# Altium PCB PCB.PcbDoc
Units mm, origin at the board's own origin, x right, y up, seen from the top; angles counter-clockwise.
Board outline 25.4 x 22.86 mm, 2 copper layers (Top Layer, Bottom Layer), stack 0.971 mm thick; 35 components, 50 nets, 185 pads, 31 vias.
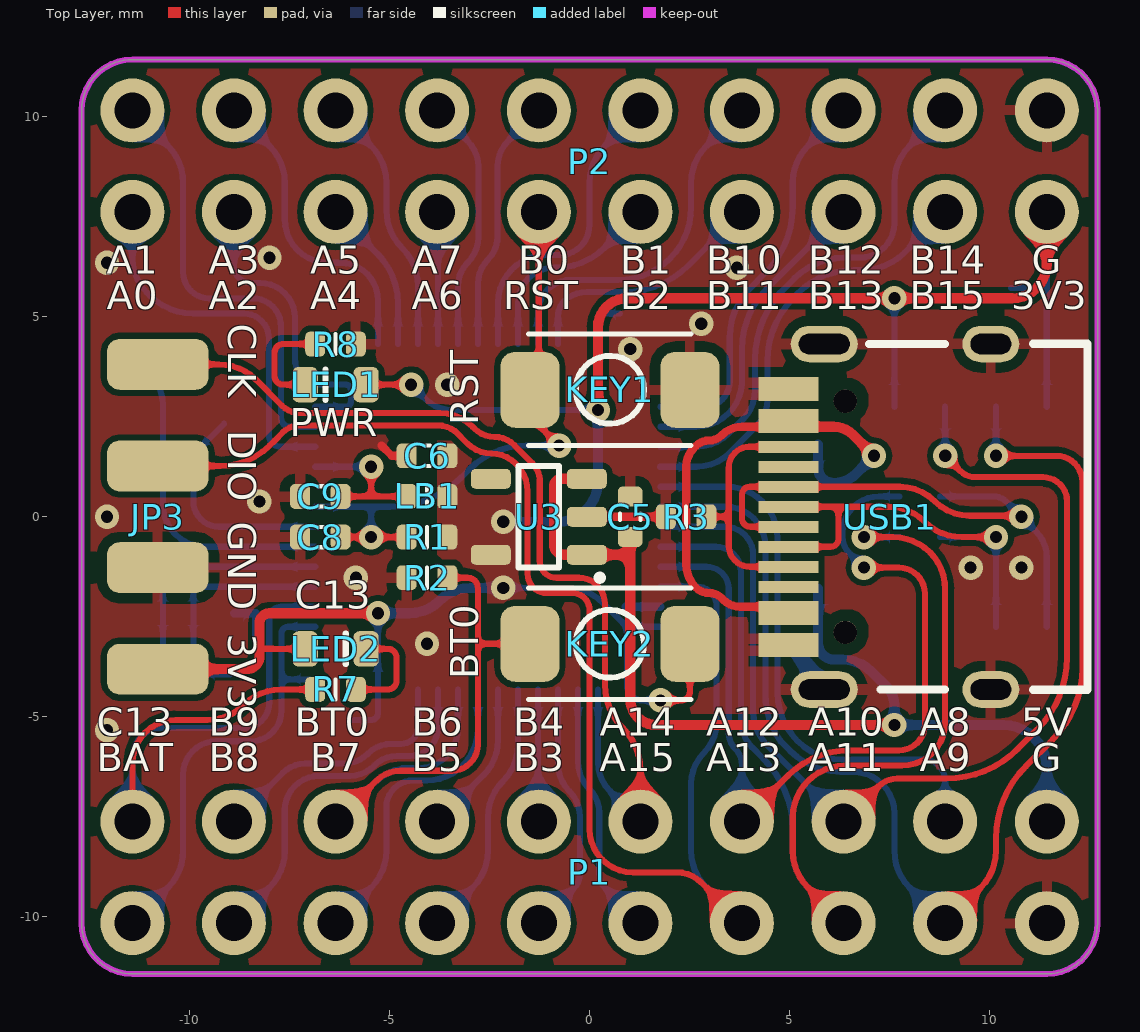
[diagram p0: Top Layer view]
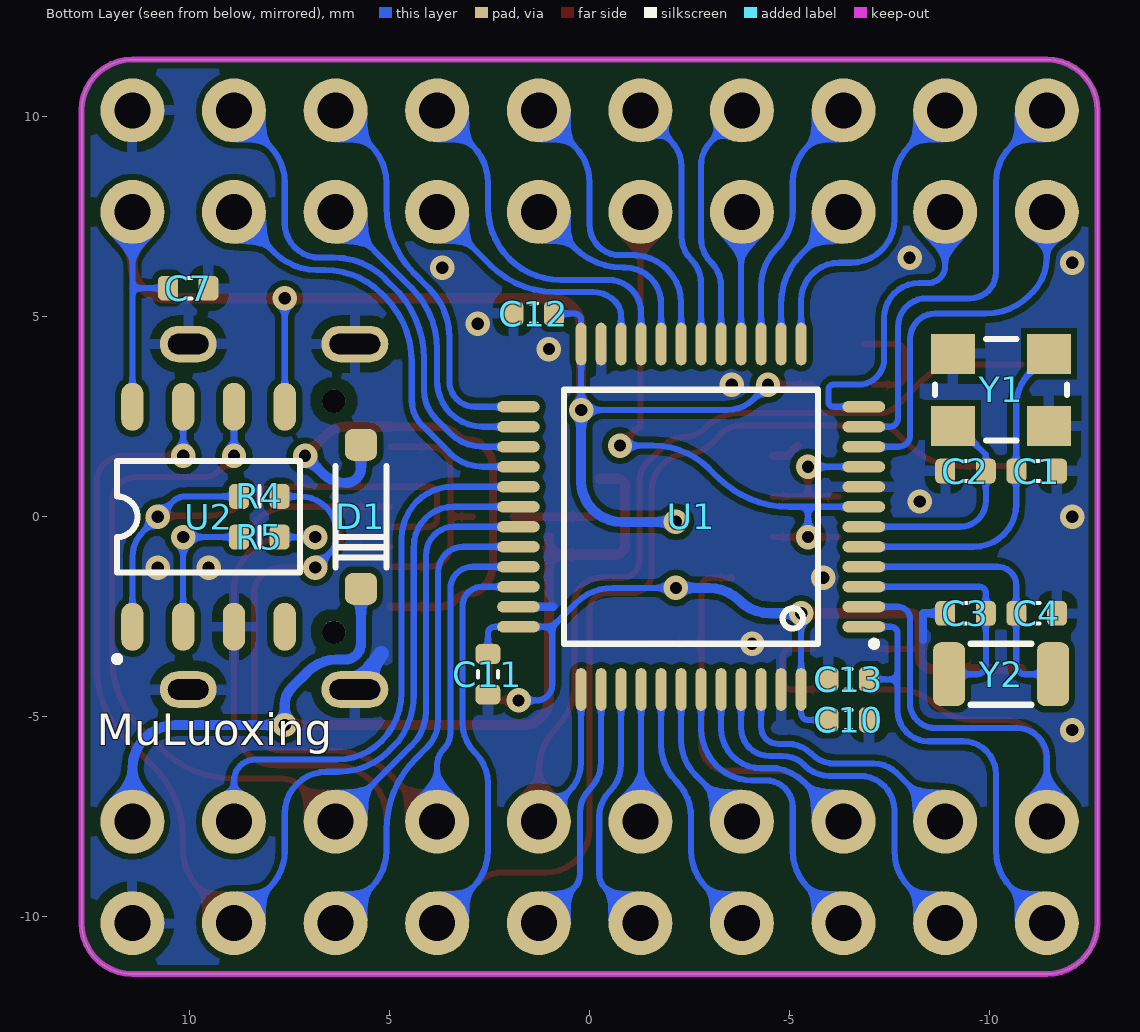
[diagram p1: Bottom Layer view, seen from below]

## Layer stack, top to bottom
Top Solder: solder mask 0.0102, Solder Resist, Dk 3.5
Top Layer: signal copper 0.0356
Dielectric 1: dielectric 0.9, FR-4, Dk 4.8
Bottom Layer: signal copper 0.0356
Bottom Solder: solder mask 0.0102, Solder Resist, Dk 3.5

## Board outline
-12.7,-10.16 -12.7,10.16 cw(c-11.43,10.16) -11.43,11.43 11.43,11.43 cw(c11.43,10.16) 12.7,10.16 12.7,-10.16 cw(c11.43,-10.16) 11.43,-11.43 -11.43,-11.43 cw(c-11.43,-10.16)

## Design rules (kind name [scope] priority, off if disabled: settings)
AssemblyTestPointUsage [All] p1 off:
AssemblyTestpoint [All] p1 off: testpointundercomponent=TRUE minsize=1.016 maxsize=2.54 preferedsize=1.524 minholesize=0 maxholesize=1.016 preferedholesize=0.813 testpointgrid=0.025 usegrid=TRUE gridtolerance=0 allowsidetop=TRUE allowsidebottom=TRUE
Clearance [All] p1: gap=0.152
ComponentClearance [All] p1 off: gap=0.254 collisioncheckmode=3 verticalgap=0.254 showdistances=FALSE
FabricationTestPointUsage [All] p1 off: valid=0 allowmultiple=FALSE
FabricationTestpoint [All] p1 off: side=3 testpointundercomponent=TRUE minsize=1.016 maxsize=2.54 preferedsize=1.524 minholesize=0 maxholesize=1.016 preferedholesize=0.813 testpointgrid=0.025 allowsidetop=TRUE allowsidebottom=TRUE usegrid=TRUE gridtolerance=0
Height [All] p1 off: minheight=0 maxheight=25.4 prefheight=12.7
HoleSize [All] p1 off: absolutevalues=TRUE maxlimit=2.54 minlimit=0.025 maxpercent=80.000 minpercent=20.000
HoleToHoleClearance [All] p1 off: gap=0.254 allowstackedmicrovias=TRUE
LayerPairs [All] p1 off: enforce=TRUE
MinimumSolderMaskSliver [All] p1 off: minsoldermaskwidth=0
NetAntennae [All] p1 off: netantennaetolerance=0
PolygonConnect [IsVia] p1: connectstyle=Direct reliefconductorwidth=0.254 reliefentries=4 polygonreliefangle="90 Angle" airgapwidth=0.254
PolygonConnect PolygonConnect_1 [InNet('3V3')] p2: connectstyle=Direct reliefconductorwidth=0.254 reliefentries=4 polygonreliefangle="90 Angle" airgapwidth=0.254
PolygonConnect PolygonConnect_2 [All] p3: connectstyle=Relief reliefconductorwidth=0.254 reliefentries=4 polygonreliefangle="90 Angle" airgapwidth=0.254
RoutingVias [All] p1: holewidth=0.711 width=1.27 viastyle="Through Hole" minholewidth=0.305 minwidth=0.61 maxholewidth=0.711 maxwidth=1.27
SilkToSilkClearance [All] p1 off: silktosilkclearance=0
SilkToSolderMaskClearance [IsPad] p1 off: minsilkscreentomaskgap=0 clearancetoexposedcopper=TRUE
SolderMaskExpansion [All] p1: expansion=0.102
Width [All] p1: maxlimit=0.762 minlimit=0.127 preferedwidth=0.152
17 further rules are at their usual default settings.

## Components (designator, comment, footprint, x,y, rotation, side; value= is the part's Value field where it differs from the comment)
C1 "20pF" "C 0402" -11.176,1.143 r0 bottom
C2 "20pF" "C 0402" -9.398,1.143 r180 bottom
C3 "10pF" "C 0402" -9.398,-2.413 r180 bottom
C4 "10pF" "C 0402" -11.176,-2.413 r0 bottom
C5 "1uF" "C 0402" 1.016,0 r90 top
C6 "1uF" "C 0402" -4.064,1.524 r180 top
C7 "0.1uF" "C 0402" 10.033,5.715 r180 bottom
C8 "0.1uF" "C 0402" -6.731,-0.508 r0 top
C9 "0.1uF" "C 0402" -6.731,0.508 r180 top
C10 "0.1uF" "C 0402" -6.477,-5.08 r0 bottom
C11 "0.1uF" "C 0402" 2.54,-3.937 r90 bottom
C12 "0.1uF" "C 0402" 1.397,5.08 r180 bottom
C13 "0.1uF" "C 0402" -6.477,-4.064 r0 bottom
D1 "MBR0530" SOD-123 5.715,0 r270 bottom
JP3 "SWD" HDR2.54-4P -10.795,0 r0 top
KEY1 "KEY" SWT3*4 0.508,3.175 r0 top
KEY2 "KEY" SWT3*4 0.508,-3.175 r0 top
LB1 "0R@100MHz" "FB 0402" -4.064,0.508 r180 top
LED1 "LED" "LED 0603_N" -6.35,3.302 r180 top
LED2 "LED" "LED 0603_N" -6.35,-3.302 r0 top
P1 "P 2x10" HDR2.54-LI-2X10P 0,-8.89 r180 top
P2 "P 2x10" HDR2.54-LI-2X10P 0,8.89 r180 top
R1 "10K" "R 0402" -4.064,-0.508 r180 top
R2 "10K" "R 0402" -4.064,-1.524 r0 top
R3 "5.1K" "R 0402" 2.413,0 r180 top
R4 "22R" "R 0402" 8.255,0.508 r0 bottom
R5 "22R" "R 0402" 8.255,-0.508 r0 bottom
R7 "4.7K" "R 0402" -6.35,-4.318 r0 top
R8 "4.7K" "R 0402" -6.35,4.318 r180 top
U1 "STM32F103C8T6" "LQFP48 7X7_N" -2.54,0 r90 bottom
U2 "CH340N" SOP8_N 9.525,0 r90 bottom
U3 "RT9013-33" SOT23-5N -1.27,0 r90 top
USB1 "Type-C_B" TYPE-C 7.493,0 r270 top
Y1 "8M" "OSC 3225-4P" -10.287,3.175 r0 bottom
Y2 "32.768KHz" FC135-3.2X1.5 -10.287,-3.937 r0 bottom

## Footprints (in the part's own frame and the unit in brackets; to place one, negate y for a bottom-side part, rotate by r counter-clockwise, add the part's x,y. Pads: shape width x height; smd on the part's side, far side on the other; paste and mask are expansions set on the pad)
"C 0402" [mm]
  rrect50% 0.5x0.62 smd: 1(-0.508,0) 2(0.508,0)
  silkscreen extent -0.08,-0.25 0.08,0.25, body extent -0.53,-0.28 0.53,0.28, height 0.5
"FB 0402" [mm] "贴片电阻"
  rrect50% 0.5x0.62 smd: 1(-0.508,0) 2(0.508,0)
  silkscreen extent 0,-0.25 0,0.25, body extent -0.5,-0.25 0.5,0.25, height 0.35
FC135-3.2X1.5 [mm] "晶振"
  rrect50% 0.8x1.6 smd: 1(-1.3,0) 2(1.3,0)
  silkscreen extent -0.76,-0.76 0.76,0.76, body extent -1.61,-0.76 1.61,0.76, height 0.91
HDR2.54-4P [mm]
  rrect50% 2.54x1.27 smd: 1(0,-3.81) 2(0,-1.27) 3(0,1.27) 4(0,3.81)
  body extent -10.4,-5.08 1.1,5.08, height 1.63
HDR2.54-LI-2X10P [mm] "双排排针，10x2脚"
  round 1.6 hole 0.9: 1(-11.43,-1.27) 2(-11.43,1.27) 3(-8.89,-1.27) 4(-8.89,1.27) 5(-6.35,-1.27) 6(-6.35,1.27) 7(-3.81,-1.27) 8(-3.81,1.27) 9(-1.27,-1.27) 10(-1.27,1.27) 11(1.27,-1.27) 12(1.27,1.27) 13(3.81,-1.27) 14(3.81,1.27) 15(6.35,-1.27) 16(6.35,1.27) 17(8.89,-1.27) 18(8.89,1.27) 19(11.43,-1.27) 20(11.43,1.27)
  body extent -12.7,-2.54 12.7,2.54, height 8.5
"LED 0603_N" [mil]
  rrect50% 25x35 smd: 1(-30,0) 2(30,0)
  silkscreen extent 10,-15 10,15, body extent -31,-16 31,16, height 24
"LQFP48 7X7_N" [mil] "7*7*1.4(长宽高，除引脚）"
  oval 11x42 smd: 1(-108.27,-170) 2(-88.58,-170) 3(-68.9,-170) 4(-49.21,-170) 5(-29.53,-170) 6(-9.84,-170) 7(9.84,-170) 8(29.53,-170) 9(49.21,-170) 10(68.9,-170) 11(88.58,-170) 12(108.27,-170) 25(108.27,170) 26(88.58,170) 27(68.9,170) 28(49.21,170) 29(29.53,170) 30(9.84,170) 31(-9.84,170) 32(-29.53,170) 33(-49.21,170) 34(-68.9,170) 35(-88.58,170) 36(-108.27,170)
  oval 42x11 smd: 13(170,-108.27) 14(170,-88.58) 15(170,-68.9) 16(170,-49.21) 17(170,-29.53) 18(170,-9.84) 19(170,9.84) 20(170,29.53) 21(170,49.21) 22(170,68.9) 23(170,88.58) 24(170,108.27) 37(-170,108.27) 38(-170,88.58) 39(-170,68.9) 40(-170,49.21) 41(-170,29.53) 42(-170,9.84) 43(-170,-9.84) 44(-170,-29.53) 45(-170,-49.21) 46(-170,-68.9) 47(-170,-88.58) 48(-170,-108.27)
  silkscreen extent -128,-183 125,125, body extent -177,-177 177,177, height 57
"OSC 3225-4P" [mm] "3.2*2.5*0.7mm(长宽高)"
  rect 1.1x1 smd: 1(-1.2,-0.9) 2(1.2,-0.9) 3(1.2,0.9) 4(-1.2,0.9)
  silkscreen extent -1.65,-1.27 1.65,1.27, body extent -1.6,-1.25 1.6,1.25, height 0.7
"R 0402" [mm] "贴片电阻"
  rrect50% 0.5x0.62 smd: 1(-0.508,0) 2(0.508,0)
  silkscreen extent 0,-0.25 0,0.25, body extent -0.5,-0.25 0.5,0.25, height 0.35
SOD-123 [mm] "2.7x1.6X1.1mm（长宽高，不包括引脚）"
  rrect50% 0.8x0.8 smd: 1(-1.8,0) 2(1.8,0)
  silkscreen extent -1.27,-0.64 1.27,0.64, body extent -1.85,-0.8 1.85,0.8, height 1.22
SOP8_N [mm] "5*6*1.8mm（长宽高）"
  oval 1.2x0.56 smd: 1(-2.75,1.905) 2(-2.75,0.635) 3(-2.75,-0.635) 4(-2.75,-1.905) 5(2.75,-1.905) 6(2.75,-0.635) 7(2.75,0.635) 8(2.75,1.905)
  silkscreen extent -3.63,-2.29 1.4,2.36, body extent -3,-2.5 3,2.5, height 1.9
SOT23-5N [mm] "3x1.6x1.1mm(长宽高)"
  rrect50% 0.5x1 smd: 1(-0.95,-1.2) 2(0,-1.2) 3(0.95,-1.2) 4(0.95,1.2) 5(-0.95,1.2)
  silkscreen extent -1.6,-1.6 1.27,0.51, body extent -1.45,-1.4 1.45,1.4, height 1.2
SWT3*4 [mm]
  rrect50% 1.48x1.9 smd: 1(-2,0) 2(2,0)
  silkscreen extent -2.03,-1.4 2.03,1.4, body extent -2.45,-1.45 2.45,1.45, height 2
TYPE-C [mm]
  round 0.58 hole 0.58 unplated: 0(-2.89,-1.1) 0(2.89,-1.1)
  oval 0.914x1.422 hole 0.508 slot 1.016 at 90 deg: 1(-4.318,2.54) 2(4.318,2.54)
  oval 0.914x1.676 hole 0.508 slot 1.27 at 90 deg: 3(4.318,-1.626) 4(-4.318,-1.626)
  rect 0.3x1.5 smd: A1(3.35,-2.52) A4(2.55,-2.52) A5(1.25,-2.52) A6(0.25,-2.52) A7(-0.25,-2.52) A8(-1.25,-2.52) A9(-2.55,-2.52) A12(-3.35,-2.52) B1(-3.05,-2.52) B4(-2.25,-2.52) B5(-1.75,-2.52) B6(-0.75,-2.52) B7(0.75,-2.52) B8(1.75,-2.52) B9(2.25,-2.52) B12(3.05,-2.52)
  silkscreen extent -4.33,-0.51 4.33,4.95, body extent -4.47,-2.76 4.47,5.14, height 3.25

## Part data
C1 C2 C3 C4 C5 C6 C7 C8 C9 C10 C11 C12 C13: library part Cap1, "无极性电容"
D1: "肖特基二极管"
JP3: library part "Header 1*4"
LB1: library part LB, "磁珠"
LED1 LED2: "发光二极管"
R1 R2 R3 R4 R5 R7 R8: library part Res, "电阻"
U1: "STM32 ARM-based 32-bit MCU with 64 Kbytes Flash, 48-pin LQFP, Industrial Temperature"
Y1: library part XTAL-4P, "4脚无源晶振"
Y2: library part XTAL-2P

## Via types
v1: diameter 0.61, hole 0.305, Top Layer to Bottom Layer, tented both sides, 31 vias

## Nets (pads, with @x,y where several pads share a name; then routed paths per layer and width w, separated by ;. In a path a pad name is that pad's centre, name@x,y a point inside that pad or via, vN(x,y) a via of type N, cw(c..) or ccw(c..) an arc to the next point about the centre after c; other vN are vias at no path point)
3V3: C6.1 C7.1 C10.2 C11.2 C12.2 JP3.1 KEY2.2 LB1.1 LED1.1 LED2.1 P2.2 R1.1 U1.24 U1.36 U1.48 U2.5 U2.8 U3.5 | length 62.1
  Top Layer w0.152: -8.255,-3.302 LED2.1 ; LED1.1 v1(-4.46,3.302) ; v1(1.773,-4.591) 2.284,-4.591 2.286,-4.593 ccw(c2.286,-4.371) 2.508,-4.371 KEY2.2
  Top Layer w0.254: JP3.1 -8.572,-3.81 ccw(c-8.572,-3.492) -8.255,-3.492 -8.255,-3.302 -8.255,-2.667 cw(c-8.001,-2.667) -8.001,-2.413 v1(-5.29,-2.413) ; v1(0.21,2.667) 0.21,4.735 cw(c0.936,4.735) 0.422,5.248 cw(c0.936,4.735) 0.936,5.461 v1(7.62,5.461) 10.563,5.461 ccw(c10.563,6.328) 11.175,5.714 ccw(c10.563,6.328) 11.43,6.328 P2.2
  Bottom Layer w0.152: C10.2 -5.461,-5.08 ccw(c-5.461,-4.909) -5.29,-4.909 U1.48 v1(-5.29,-2.413) ; v1(-4.46,3.302) -4.106,2.947 ; -4.105,2.947 ccw(c-3.429,3.624) -3.429,2.667 v1(0.21,2.667) U1.24 0.21,4.909 cw(c0.381,4.909) 0.381,5.08 C12.2@0.762,5.08 ; v1(-2.159,-1.778) -0.578,-1.778 cw(c-0.578,-3.079) 0.342,-2.159 0.933,-2.75 ; v1(1.773,-4.591) 1.329,-4.591 1.327,-4.593 cw(c1.327,-4.199) 1.049,-4.478 cw(c1.327,-4.199) 0.933,-4.199 0.933,-2.75 ; C11.2@2.54,-3.302 2.54,-2.921 ccw(c2.369,-2.921) 2.369,-2.75 U1.36 0.933,-2.75 ; U2.5 v1(7.62,5.461) ; C7.1 11.43,5.715 ; U2.8 11.43,5.715 ; P2.2 11.43,5.715
  Bottom Layer w0.254: v1(-5.29,-2.413) -4.513,-2.413 ccw(c-4.513,-1.329) -3.747,-2.095 cw(c-2.98,-2.862) -2.98,-1.778 v1(-2.159,-1.778) ; v1(-2.159,-0.127) -0.799,-0.127 ccw(c-0.799,0.882) -0.086,0.168 ccw(c-0.799,0.882) 0.21,0.882 v1(0.21,2.667)
5V: C5.1 D1.2 P1.1 U3.1 U3.3 | length 25.6
  Top Layer w0.254: U3.3@-0.254,0.95 -0.701,0.95 ccw(c-0.701,0.762) -0.889,0.762 -0.889,-0.696 ccw(c-0.635,-0.696) -0.635,-0.95 U3.1 0.184,-0.95 1.016,-0.95 ; C5.1 1.016,-0.95 ; v1(7.62,-5.207) 1.666,-5.207 cw(c1.666,-4.557) 1.207,-5.017 cw(c1.666,-4.557) 1.016,-4.557 1.016,-0.95
  Bottom Layer w0.254: D1.2 5.715,-3.167 ccw(c6.12,-3.167) 6.12,-3.572 6.32,-3.572 cw(c6.32,-4.602) 7.048,-3.873 7.44,-4.265 ; P1.1 11.43,-6.291 ccw(c10.346,-6.291) 11.112,-5.525 ccw(c10.346,-6.291) 10.346,-5.207 v1(7.62,-5.207) 7.62,-4.699 ccw(c7.007,-4.699) 7.441,-4.266 ; 7.441,-4.266 ccw(c7.007,-4.699) 7.44,-4.265
BOOT0: KEY2.1 P1.15 R2.2 U1.44 | length 15.7
  Top Layer w0.152: P1.15 -5.334,-6.604 cw(c-4.721,-7.217) -4.721,-6.35 -3.444,-6.35 ccw(c-3.444,-5.7) -2.985,-6.16 ccw(c-3.444,-5.7) -2.794,-5.7 -2.794,-3.175 ; R2.2 -3.048,-1.524 cw(c-3.048,-1.778) -2.794,-1.778 -2.794,-3.175 ; KEY2.1 -2.794,-3.175
  Bottom Layer w0.152: P1.15 -5.384,-6.654 cw(c-4.445,-7.593) -4.683,-6.287 -4.286,-6.287 ccw(c-4.286,-5.29) -3.582,-5.995 ccw(c-4.286,-5.29) -3.29,-5.29 U1.44
D+: R4.2 U2.1 USB1.A6 USB1.B6 | length 14.4
  Top Layer w0.152: 3.871,-0.188 cw(c4.02,-0.04) 3.81,-0.04 3.81,0.554 cw(c4.006,0.554) 3.867,0.692 cw(c4.006,0.554) 4.006,0.75 USB1.B6 7.755,0.75 cw(c7.755,-0.487) 8.629,0.388 ; 3.872,-0.189 ccw(c4.02,-0.04) 4.02,-0.25 USB1.A6 USB1.A6@4.977,-0.254 ; 8.63,0.387 ccw(c9.504,1.262) 9.504,0.025 10.77,0.025 v1(10.795,0)
  Bottom Layer w0.152: R4.2 10.107,0.508 cw(c10.107,0.074) 10.414,0.381 v1(10.795,0) 11.161,-0.366 cw(c10.51,-1.016) 11.43,-1.016 U2.1
D-: R5.2 U2.2 USB1.A7 USB1.B7 | length 11.2
  Top Layer w0.152: USB1.B7 6.027,-0.75 ccw(c6.027,-0.554) 6.165,-0.693 ccw(c6.027,-0.554) 6.223,-0.554 6.223,0.25 ; USB1.A7 6.223,0.25 ; v1(10.16,-0.508) 9.302,-0.508 cw(c9.302,0.793) 8.382,-0.127 ccw(c7.472,-1.037) 7.472,0.25 6.223,0.25
  Bottom Layer w0.152: R5.2 v1(10.16,-0.508) U2.2
GND: C1.1 C2.1 C3.1 C4.1 C5.2 C6.2 C7.2 C8.1 C9.2 C10.1 C11.1 C12.1 C13.2 JP3.2 KEY1.2 P1.2 P2.1 R2.1 R3.2 R8.1 U1.8 U1.23 U1.35 U1.47 U2.3 U3.2 USB1.1 USB1.2 USB1.3 USB1.4 USB1.A1 USB1.A12 USB1.B1 USB1.B12 Y1.2 Y1.4 | length 5.9
  Top Layer w0.203: -5.203,1.782 -4.945,1.524 C6.2 ; U3.2 R3.2
  Bottom Layer w0.203: C3.1 -8.338,-2.413 -8.338,-3.082 ; 0.9,-2.25 U1.35
  Bottom Layer w0.381: 5.207,-3.42 5.864,-4.32 USB1.3@5.868,-4.325
  other v1: -12.065,-5.334 -4.064,-3.175 -5.842,-1.524 9.525,-1.27 10.795,-1.27 -12.065,0 -8.255,0.381 -3.556,3.302 1.016,4.191 2.794,4.826 3.683,6.223 -12.065,6.35 -8.001,6.477
NetLED1_2: LED1.2 R8.2 | length 2.6
  Top Layer w0.152: LED1.2 -7.657,3.302 cw(c-7.657,3.519) -7.81,3.365 cw(c-7.657,3.519) -7.874,3.519 -7.874,4.101 cw(c-7.657,4.101) -7.811,4.254 cw(c-7.657,4.101) -7.657,4.318 R8.2
NetLED2_2: LED2.2 R7.2 | length 2.6
  Top Layer w0.152: R7.2 -5.043,-4.318 ccw(c-5.043,-4.101) -4.89,-4.255 ccw(c-5.043,-4.101) -4.826,-4.101 -4.826,-3.519 ccw(c-5.043,-3.519) -4.889,-3.366 ccw(c-5.043,-3.519) -5.043,-3.302 LED2.2
NetR3_1: R3.1 USB1.A5 USB1.B5 | length 6.1
  Top Layer w0.152: R3.1 3.48,0 ; 3.633,1.601 ccw(c4.003,1.232) 3.484,1.297 ccw(c4.003,1.232) 3.48,1.232 3.48,0 ; 3.633,1.601 cw(c3.993,1.242) 3.993,1.75 USB1.B5 ; USB1.A5 4.009,-1.25 cw(c4.009,-0.721) 3.635,-1.095 cw(c4.009,-0.721) 3.48,-0.721 3.48,0
NRST: C8.2 KEY1.1 P2.12 R1.2 U1.7 | length 15
  Top Layer w0.152: C8.2 v1(-5.461,-0.508) R1.2 ; P2.12 -1.27,2.286 v1(-0.762,1.778)
  Bottom Layer w0.152: U1.7 -5.461,0.25 ; v1(-5.461,-0.508) -5.461,0.25 ; v1(-0.762,1.778) -1.587,1.778 ccw(c-1.587,-0.215) -2.997,1.194 -3.197,0.994 cw(c-4.993,2.79) -4.993,0.25 -5.461,0.25
OSC32_IN: C3.2 U1.3 Y2.2 | length 6
  Bottom Layer w0.152: Y2.2 -9.689,-3.937 cw(c-9.689,-3.72) -9.842,-3.874 cw(c-9.689,-3.72) -9.906,-3.72 C3.2 -9.906,-1.905 cw(c-9.751,-1.905) -9.751,-1.75 U1.3
OSC32_OUT: C4.2 U1.4 Y2.1 | length 7.1
  Bottom Layer w0.152: Y2.1 -10.885,-3.937 ccw(c-10.885,-3.72) -10.732,-3.874 ccw(c-10.885,-3.72) -10.668,-3.72 C4.2 -10.668,-1.718 cw(c-10.2,-1.718) -10.531,-1.387 cw(c-10.2,-1.718) -10.2,-1.25 U1.4
OSC_IN: C1.2 U1.5 Y1.1 | length 8.5
  Bottom Layer w0.152: Y1.1 -10.995,3.583 cw(c-11.783,2.794) -10.668,2.794 C1.2 -10.668,0.314 ccw(c-9.604,0.314) -10.357,-0.438 ; -10.356,-0.439 ccw(c-9.604,0.314) -9.604,-0.75 U1.5
OSC_OUT: C2.2 U1.6 Y1.3 | length 5.7
  Bottom Layer w0.152: Y1.3@-9.137,2.325 -9.906,1.556 C2.2 -9.906,0.394 ccw(c-9.262,0.394) -9.718,-0.061 ccw(c-9.262,0.394) -9.262,-0.25 U1.6
PA0: P2.20 U1.10 | length 9.4
  Bottom Layer w0.152: P2.20 -11.43,6.477 ccw(c-10.204,6.477) -11.071,5.61 ; -11.071,5.61 -10.986,5.524 ; -10.985,5.524 ccw(c-9.912,6.598) -9.912,5.08 -8.641,5.08 cw(c-8.641,4.455) -8.199,4.897 cw(c-8.641,4.455) -8.016,4.455 -8.016,2.04 ccw(c-7.726,2.04) -7.931,1.835 ccw(c-7.726,2.04) -7.726,1.75 U1.10
PA1: P2.19 U1.11 | length 11
  Bottom Layer w0.152: P2.19 -10.541,9.271 cw(c-11.461,8.351) -10.16,8.351 -10.16,6.111 ccw(c-9.51,6.111) -9.97,5.652 ccw(c-9.51,6.111) -9.51,5.461 -8.423,5.461 cw(c-8.423,4.749) -7.919,5.252 cw(c-8.423,4.749) -7.711,4.749 -7.711,2.468 ccw(c-7.493,2.468) -7.493,2.25 U1.11
PA2: P2.18 U1.12 | length 7.7
  Bottom Layer w0.152: P2.18 -8.89,6.276 ccw(c-8.456,6.276) -8.763,5.969 ccw(c-8.456,6.276) -8.456,5.842 -8.233,5.842 cw(c-8.233,4.975) -7.621,5.589 cw(c-8.233,4.975) -7.366,4.975 -7.366,3.952 ccw(c-6.716,3.952) -7.176,3.493 ccw(c-6.716,3.952) -6.716,3.302 -6.096,3.302 cw(c-6.096,3.175) -5.969,3.175 -5.969,2.877 cw(c-6.096,2.877) -6.096,2.75 U1.12
PA3: P2.17 U1.13 | length 7.8
  Bottom Layer w0.152: P2.17 -8.001,9.271 cw(c-8.921,8.351) -7.62,8.351 -7.62,7.434 ccw(c-6.536,7.434) -7.302,6.668 ccw(c-6.536,7.434) -6.536,6.35 -6.232,6.35 cw(c-6.232,5.408) -5.566,6.074 cw(c-6.232,5.408) -5.29,5.408 U1.13
PA4: P2.16 U1.14 | length 3.9
  Bottom Layer w0.152: P2.16 -5.303,6.573 cw(c-6.543,5.334) -4.79,5.334 U1.14
PA5: P2.15 U1.15 | length 6.5
  Bottom Layer w0.152: P2.15 -5.461,9.271 cw(c-6.381,8.351) -5.08,8.351 -5.08,7.671 ccw(c-3.731,7.671) -4.685,6.717 cw(c-5.639,5.763) -4.29,5.763 U1.15
PA6: P2.14 U1.16 | length 3.3
  Bottom Layer w0.152: P2.14 -3.79,7.6 U1.16
PA7: P2.13 U1.17 | length 6.4
  Bottom Layer w0.152: P2.13 -3.048,9.398 cw(c-3.692,8.754) -2.781,8.754 -2.781,6.997 cw(c-3.696,6.997) -3.049,6.35 ccw(c-2.468,5.769) -3.29,5.769 U1.17
PA8: P1.3 U1.29 | length 14
  Bottom Layer w0.152: U1.29 3.427,0.75 cw(c3.427,-0.51) 4.318,0.381 cw(c3.398,-0.539) 4.699,-0.539 4.699,-4.388 ccw(c6.433,-4.388) 5.207,-5.615 ccw(c6.307,-4.515) 6.307,-6.071 8.36,-6.071 cw(c8.36,-6.6) 8.735,-6.226 cw(c8.36,-6.6) 8.89,-6.6 P1.3
PA9: P1.4 U1.30 U2.7 | length 31
  Top Layer w0.152: P1.4 9.779,-9.271 ccw(c8.859,-8.351) 10.16,-8.351 10.16,-8.037 cw(c12.7,-8.037) 10.904,-6.241 11.575,-5.57 ccw(c9.779,-3.774) 12.319,-3.774 12.319,0.874 ccw(c11.669,0.874) 12.129,1.333 ccw(c11.669,0.874) 11.669,1.524 v1(10.16,1.524)
  Bottom Layer w0.152: U1.30 3.404,0.25 cw(c3.404,-0.74) 4.104,-0.04 ; 4.105,-0.041 cw(c3.404,-0.74) 4.394,-0.74 4.394,-4.433 ccw(c6.412,-4.433) 4.779,-5.618 5.015,-5.854 ccw(c6.273,-4.596) 6.273,-6.375 6.579,-6.375 cw(c6.579,-7.416) 7.315,-6.68 cw(c6.579,-7.416) 7.62,-7.416 7.62,-8.351 ccw(c8.921,-8.351) 8.001,-9.271 P1.4 ; v1(10.16,1.524) U2.7
PA10: P1.5 U1.31 U2.6 | length 26.6
  Top Layer w0.152: P1.5 7.239,-6.731 cw(c7.683,-7.175) 7.683,-6.547 8.911,-6.547 ccw(c8.911,-4.007) 10.707,-5.803 11.194,-5.316 ccw(c9.398,-3.52) 11.938,-3.52 11.938,0.384 ccw(c11.331,0.384) 11.76,0.813 ccw(c11.331,0.384) 11.331,0.991 9.639,0.991 cw(c9.639,1.511) 9.271,1.143 v1(8.89,1.524)
  Bottom Layer w0.152: U1.31 3.389,-0.25 cw(c3.389,-0.951) 3.884,-0.455 ; 3.885,-0.456 cw(c3.389,-0.951) 4.089,-0.951 4.089,-4.857 ccw(c5.303,-4.857) 4.445,-5.715 P1.5 ; v1(8.89,1.524) U2.6
PA11: P1.6 R5.1 U1.32 | length 27.3
  Top Layer w0.152: P1.6 5.461,-9.271 cw(c6.381,-8.351) 5.08,-8.351 5.08,-7.524 cw(c6.381,-7.524) 5.461,-6.604 cw(c6.381,-7.524) 6.381,-6.223 7.806,-6.223 ccw(c7.806,-5.139) 8.572,-5.905 ccw(c7.806,-5.139) 8.89,-5.139 8.89,-1.809 ccw(c7.589,-1.809) 8.509,-0.889 ccw(c7.589,-1.809) 7.589,-0.508 v1(6.858,-0.508)
  Bottom Layer w0.152: U1.32 3.157,-0.75 cw(c3.157,-1.378) 3.6,-0.933 ; 3.601,-0.934 cw(c3.157,-1.378) 3.785,-1.378 3.785,-5.091 ccw(c4.739,-5.091) 4.063,-5.764 ; 4.064,-5.765 4.336,-6.037 cw(c2.54,-7.833) 5.08,-7.833 5.08,-8.351 ccw(c6.381,-8.351) 5.461,-9.271 P1.6 ; v1(6.858,-0.508) R5.1
PA12: P1.7 R4.1 U1.33 | length 21.7
  Top Layer w0.152: P1.7 4.953,-6.477 cw(c6.486,-8.01) 4.954,-6.476 cw(c6.486,-8.01) 6.486,-5.842 7.732,-5.842 ccw(c7.732,-5.192) 8.191,-5.652 ccw(c7.732,-5.192) 8.382,-5.192 8.382,-1.92 ccw(c7.732,-1.92) 8.192,-1.461 ccw(c7.732,-1.92) 7.732,-1.27 v1(6.858,-1.27)
  Bottom Layer w0.152: U1.33 2.925,-1.25 cw(c2.925,-1.804) 3.317,-1.412 cw(c2.925,-1.804) 3.48,-1.804 3.48,-5.405 ccw(c4.043,-5.405) 3.645,-5.804 cw(c3.246,-6.202) 3.81,-6.202 P1.7 ; 6.591,0.241 ccw(c7.235,-0.403) 6.325,-0.403 6.325,-0.508 ccw(c6.876,-0.508) 6.486,-0.898 v1(6.858,-1.27) ; 6.592,0.242 cw(c7.235,-0.403) 7.235,0.508 R4.1
PA13: JP3.3 P1.8 U1.34 | length 35.1
  Top Layer w0.152: JP3.3 -9.227,1.27 ccw(c-9.227,3.004) -8.001,1.778 -7.874,1.905 -7.673,2.106 cw(c-7.239,1.673) -7.239,2.286 -3.799,2.286 cw(c-3.799,1.583) -3.362,2.134 ; -3.359,2.137 -3.051,1.829 ccw(c-2.452,2.429) -2.452,1.581 cw(c-2.452,0.734) -1.853,1.333 -1.827,1.307 cw(c-2.502,0.635) -1.549,0.635 -1.549,-1.428 ccw(c-1.072,-1.428) -1.41,-1.765 ccw(c-1.072,-1.428) -1.072,-1.905 -0.434,-1.905 cw(c-0.434,-2.339) -0.127,-2.032 cw(c-0.434,-2.339) 0,-2.339 0,-7.806 ccw(c1.084,-7.806) 0.318,-8.572 ccw(c1.084,-7.806) 1.084,-8.89 2.181,-8.89 cw(c2.181,-9.757) 2.793,-9.143 P1.8
  Bottom Layer w0.152: U1.34 2.694,-1.75 cw(c2.694,-2.231) 3.034,-1.891 cw(c2.694,-2.231) 3.175,-2.231 3.175,-5.139 cw(c2.091,-5.139) 2.857,-5.905 ccw(c3.624,-6.672) 2.54,-6.672 2.54,-8.351 ccw(c3.841,-8.351) 2.921,-9.271 P1.8
PA14: JP3.4 P1.9 U1.37 | length 24.3
  Top Layer w0.152: JP3.4 -9.271,3.81 cw(c-9.271,2.484) -8.333,3.421 -7.689,2.777 ccw(c-7.239,3.227) -7.688,2.776 ccw(c-7.239,3.227) -7.239,2.591 -3.743,2.591 cw(c-3.743,1.429) -2.922,2.251 -2.873,2.202 ccw(c-2.376,2.699) -2.376,1.996 cw(c-2.376,1.294) -1.88,1.791 -1.43,1.341 cw(c-1.882,0.89) -1.245,0.927 ; -1.244,0.89 ccw(c-1.882,0.89) -1.245,0.927 ; 0.825,-5.27 cw(c1.899,-4.197) 0.381,-4.197 0.381,-2.174 ccw(c-0.269,-2.174) 0.191,-1.715 ccw(c-0.269,-2.174) -0.269,-1.524 -0.83,-1.524 cw(c-0.83,-1.11) -1.123,-1.403 cw(c-0.83,-1.11) -1.245,-1.11 -1.245,0.927 ; 0.826,-5.271 cw(c-0.248,-6.344) 1.27,-6.344 P1.9
  Bottom Layer w0.152: U1.37 0.21,-6.139 ccw(c1.227,-6.139) 0.508,-6.858 P1.9
PA15: P1.10 U1.38 | length 6.4
  Bottom Layer w0.152: U1.38 -0.29,-6.114 ccw(c0.7,-6.114) 0,-6.815 cw(c-0.583,-7.397) 0.241,-7.397 0.241,-8.934 ccw(c0.718,-8.934) 0.381,-9.271 P1.10
PB0: P2.11 U1.18 | length 6.4
  Bottom Layer w0.152: U1.18 -2.79,5.825 cw(c-1.936,5.825) -2.54,6.428 ccw(c-3.123,7.011) -2.299,7.011 -2.299,8.754 cw(c-1.388,8.754) -2.033,9.397 P2.11
PB1: P2.9 U1.19 | length 7.8
  Bottom Layer w0.152: U1.19 -2.29,5.347 cw(c-1.104,5.347) -1.943,6.185 cw(c-1.088,5.331) -1.213,6.533 cw(c-1.088,5.331) -1.088,6.539 -0.756,6.539 ccw(c-0.756,7.289) -0.226,6.759 ccw(c-0.772,7.305) 0,7.305 0,8.351 cw(c1.301,8.351) 0.381,9.271 P2.9
PB2: P2.10 U1.20 | length 5.1
  Bottom Layer w0.152: U1.20 -1.79,5.327 cw(c-0.882,5.327) -1.525,5.968 ; -1.524,5.969 cw(c-0.898,5.343) -0.898,6.228 -0.833,6.228 ccw(c-0.833,7.945) 0.381,6.731 P2.10
PB3: P1.12 U1.39 | length 6.4
  Bottom Layer w0.152: P1.12 -0.381,-9.271 ccw(c-0.718,-8.934) -0.241,-8.934 -0.241,-7.502 ccw(c-1.152,-7.502) -0.507,-6.859 cw(c0.173,-6.177) -0.79,-6.177 U1.39
PB4: P1.11 U1.40 | length 3.3
  Bottom Layer w0.152: U1.40 -1.29,-7.6 P1.11
PB5: P1.14 U1.41 | length 6.5
  Bottom Layer w0.152: P1.14 -2.921,-9.271 ccw(c-3.841,-8.351) -2.54,-8.351 -2.54,-7.515 cw(c-1.26,-7.515) -2.166,-6.611 ; -2.164,-6.609 ccw(c-3.07,-5.705) -1.79,-5.705 U1.41
PB6: P1.13 U1.42 | length 3.9
  Bottom Layer w0.152: P1.13 -2.652,-6.462 ccw(c-3.526,-5.588) -2.29,-5.588 U1.42
PB7: P1.16 U1.43 | length 7.8
  Bottom Layer w0.152: P1.16 -5.461,-9.271 ccw(c-6.381,-8.351) -5.08,-8.351 -5.08,-7.263 cw(c-4.408,-7.263) -4.883,-6.788 cw(c-4.408,-7.263) -4.408,-6.591 -4.064,-6.591 ccw(c-4.064,-5.335) -3.176,-6.224 ; -3.175,-6.223 ccw(c-4.105,-5.293) -3.174,-6.222 ccw(c-4.105,-5.293) -2.79,-5.293 U1.43
PB8: P1.18 U1.45 | length 9.1
  Bottom Layer w0.152: P1.18 -8.001,-9.271 ccw(c-8.921,-8.351) -7.62,-8.351 -7.62,-7.344 cw(c-6.753,-7.344) -7.367,-6.732 cw(c-6.753,-7.344) -6.753,-6.477 -5.988,-6.477 ccw(c-5.988,-5.632) -5.39,-6.229 -5.367,-6.206 cw(c-4.826,-6.747) -4.826,-5.982 -4.496,-5.982 ccw(c-4.496,-5.275) -3.997,-5.775 ccw(c-4.496,-5.275) -3.79,-5.275 U1.45
PB9: P1.17 U1.46 | length 6.5
  Bottom Layer w0.152: P1.17 -7.676,-6.406 cw(c-7.112,-6.969) -7.112,-6.172 -6.141,-6.172 ccw(c-6.141,-5.327) -5.544,-5.925 -5.539,-5.92 cw(c-4.953,-6.505) -4.953,-5.677 -4.707,-5.677 ccw(c-4.707,-5.26) -4.412,-5.555 ccw(c-4.707,-5.26) -4.29,-5.26 U1.46
PB10: P2.7 U1.21 | length 9
  Bottom Layer w0.152: U1.21 -1.29,5.1 cw(c-0.466,5.1) -1.049,5.682 cw(c-0.466,5.1) -0.466,5.923 0.728,5.923 ccw(c0.728,7.736) 2.009,6.454 ccw(c0.728,7.736) 2.54,7.736 2.54,8.351 cw(c3.841,8.351) 2.921,9.271 P2.7
PB11: P2.8 U1.22 | length 6.3
  Bottom Layer w0.152: U1.22 -0.79,5.014 cw(c-0.261,5.014) -0.635,5.388 cw(c-0.08,4.833) -0.08,5.619 0.864,5.619 ccw(c0.864,7.898) 2.476,6.286 2.921,6.731 P2.8
PB12: P2.5 U1.25 | length 9.8
  Bottom Layer w0.152: U1.25 2.866,2.75 ccw(c2.866,3.389) 3.318,2.937 ; 3.319,2.938 ccw(c2.866,3.389) 3.505,3.389 3.505,4.487 cw(c5.242,4.487) 4.014,5.715 4.395,6.096 ccw(c2.741,7.75) 4.396,6.097 ccw(c2.741,7.75) 5.08,7.75 5.08,8.351 cw(c6.381,8.351) 5.461,9.271 P2.5
PB13: P2.6 U1.26 | length 7.9
  Bottom Layer w0.152: U1.26 2.665,2.25 ccw(c2.665,3.395) 3.475,2.586 ccw(c2.665,3.395) 3.808,3.323 ; 3.81,3.323 3.81,4.182 cw(c5.978,4.182) 4.444,5.714 cw(c5.978,4.182) 4.445,5.715 P2.6
PB14: P2.3 U1.27 | length 12.6
  Bottom Layer w0.152: U1.27 2.667,1.75 ccw(c2.667,2.909) 3.486,2.089 3.835,2.438 ccw(c3.098,3.175) 4.14,3.175 4.14,3.936 cw(c6.68,3.936) 4.764,5.603 5.117,5.956 cw(c6.375,4.698) 6.375,6.477 6.753,6.477 ccw(c6.753,7.344) 7.365,6.73 ccw(c6.753,7.344) 7.62,7.344 7.62,8.351 cw(c8.921,8.351) 8.001,9.271 P2.3
PB15: P2.4 U1.28 | length 10.8
  Bottom Layer w0.152: U1.28@1.758,1.25 U1.28 2.667,1.25 ccw(c2.667,2.428) 3.499,1.594 4.176,2.271 ccw(c3.525,2.921) 4.177,2.272 ccw(c3.525,2.921) 4.445,2.921 4.445,3.874 cw(c6.743,3.874) 5.118,5.499 5.207,5.588 cw(c6.617,4.179) 6.617,6.172 6.832,6.172 ccw(c6.832,7.646) 7.873,6.603 ; 7.874,6.604 P2.4
PC13: P1.19 R7.1 U1.2 | length 16.1
  Top Layer w0.152: P1.19 -11.43,-6.164 cw(c-10.346,-6.164) -11.112,-5.398 cw(c-10.346,-6.164) -10.346,-5.08 -9.556,-5.08 ccw(c-9.556,-3.779) -8.636,-4.699 cw(c-7.716,-5.619) -7.716,-4.318 R7.1
  Bottom Layer w0.152: P1.19 -11.43,-6.02 cw(c-10.693,-6.02) -11.214,-5.499 cw(c-10.693,-6.02) -10.693,-5.283 -8.646,-5.283 ccw(c-8.646,-4.645) -8.195,-5.097 ; -8.194,-5.096 ccw(c-8.646,-4.645) -8.008,-4.645 -8.008,-2.54 cw(c-7.718,-2.54) -7.923,-2.335 cw(c-7.718,-2.54) -7.718,-2.25 U1.2
VBAT: C13.1 P1.20 U1.1 | length 11.1
  Bottom Layer w0.152: P1.20 -10.541,-9.271 ccw(c-11.461,-8.351) -10.16,-8.351 -10.16,-6.437 cw(c-9.336,-6.437) -9.919,-5.855 cw(c-9.336,-6.437) -9.336,-5.613 -8.472,-5.613 ccw(c-8.472,-4.845) -7.929,-5.389 ; -7.928,-5.388 ccw(c-8.472,-4.845) -7.703,-4.845 -7.703,-4.064 ; C13.1 -7.703,-4.064 ; U1.1 -7.532,-2.75 ccw(c-7.532,-2.921) -7.703,-2.921 -7.703,-4.064
VCC_USB: D1.1 USB1.A4 USB1.A9 USB1.B4 USB1.B9 | length 13.4
  Top Layer w0.203: 2.605,1.716 ccw(c3.061,1.261) 2.417,1.261 2.417,-1.185 ccw(c3.244,-1.185) 2.659,-1.77 ccw(c2.984,-1.445) 2.984,-1.905 cw(c2.984,-2.365) 3.31,-2.04 3.348,-2.078 ccw(c3.764,-1.661) 3.764,-2.25 USB1.B9 ; 2.606,1.717 2.659,1.77 cw(c2.984,1.445) 2.984,1.905 ccw(c2.984,2.365) 3.31,2.04 cw(c3.817,1.532) 3.817,2.25 USB1.B4
  Top Layer w0.254: USB1.B4 6.096,2.25 cw(c6.096,1.55) 6.591,2.045 v1(7.112,1.524)
  Bottom Layer w0.254: D1.1 5.715,1.225 ccw(c6.096,1.225) 6.096,0.844 ccw(c6.096,1.654) 6.669,1.081 v1(7.112,1.524)
VDDA: C9.1 LB1.2 U1.9 | length 3.8
  Top Layer w0.152: C9.1 -5.461,0.508 ; v1(-5.461,1.25) -5.461,0.508 ; LB1.2 -5.461,0.508
  Bottom Layer w0.152: U1.9 v1(-5.461,1.25)
pads on no net: U2.4 U3.4 USB1.0 USB1.A8 USB1.B8

## Polygon pours and split planes (outlines as drawn)
GND on Top Layer "Bottom Layer-No Net" (solid, remove dead copper, pour order 4): -11.43,11.43 ccw(c-11.43,10.16) -12.7,10.16 -12.7,-10.16 ccw(c-11.43,-10.16) -11.43,-11.43 11.43,-11.43 ccw(c11.43,-10.16) 12.7,-10.16 12.7,10.16 ccw(c11.43,10.16) 11.43,11.43
3V3 on Top Layer "Bottom Layer-No Net" (solid, pour order 0): -1.524,-2.159 -3.81,-2.159 -3.81,1.905 -1.524,1.905
GND on Bottom Layer "Bottom Layer-No Net" (solid, remove dead copper, pour order 2): -11.43,11.43 ccw(c-11.43,10.16) -12.7,10.16 -12.7,-10.16 ccw(c-11.43,-10.16) -11.43,-11.43 11.43,-11.43 ccw(c11.43,-10.16) 12.7,-10.16 12.7,10.16 ccw(c11.43,10.16) 11.43,11.43

## Keep-outs
Keep-Out Layer:
  the board outline again, w0.152

## Other copper
Top Layer:
  pour cut-out: 6.975,2.89 6.975,2.948 ccw(c6.451,2.948) 6.451,3.472 6.393,3.472 ccw(c6.393,2.89) 5.811,2.89 ccw(c6.393,2.89) 6.393,2.308 ccw(c6.393,2.89)
  pour cut-out: 6.975,-2.89 6.975,-2.832 ccw(c6.451,-2.832) 6.451,-2.308 6.393,-2.308 ccw(c6.393,-2.89) 5.811,-2.89 ccw(c6.393,-2.89) 6.393,-3.472 ccw(c6.393,-2.89)
Bottom Layer:
  pour cut-out: 6.975,-2.89 6.975,-2.832 ccw(c6.451,-2.832) 6.451,-2.308 6.393,-2.308 ccw(c6.393,-2.89) 5.811,-2.89 ccw(c6.393,-2.89) 6.393,-3.472 ccw(c6.393,-2.89)
  pour cut-out: 6.975,2.89 6.975,2.948 ccw(c6.451,2.948) 6.451,3.472 6.393,3.472 ccw(c6.393,2.89) 5.811,2.89 ccw(c6.393,2.89) 6.393,2.308 ccw(c6.393,2.89)
  pour cut-out: -11.897,8.43 -11.858,8.469 ccw(c-12.28,8.89) -11.684,8.89 ccw(c-12.28,8.89) -11.858,9.311 -11.897,9.35 -11.43,9.35 -11.43,8.43

## Silkscreen, mask and mechanical layers (free items; w line width, h text height)
Top Overlay:
  text "A1" at -12.065,5.842 h1.2
  text "A3" at -9.525,5.842 h1.2
  text "A5" at -6.985,5.842 h1.2
  text "A7" at -4.445,5.842 h1.2
  text "B0" at -1.778,5.842 h1.2
  text "B1" at 0.762,5.842 h1.2
  text "B10" at 2.921,5.842 h1.2
  text "B12" at 5.461,5.842 h1.2
  text "B14" at 8.001,5.842 h1.2
  text "G" at 11.049,5.842 h1.2
  text "A0" at -12.065,4.953 h1.2
  text "A2" at -9.525,4.953 h1.2
  text "A4" at -6.985,4.953 h1.2
  text "A6" at -4.445,4.953 h1.2
  text "RST" at -2.159,4.953 h1.2
  text "B2" at 0.762,4.953 h1.2
  text "B11" at 2.921,4.953 h1.2
  text "B13" at 5.461,4.953 h1.2
  text "B15" at 8.001,4.953 h1.2
  text "3V3" at 10.541,4.953 h1.2
  text "CLK" at -9.271,4.826 h1.2 r270
  text "RST" at -2.54,2.286 h1.2 r90
  text "DIO" at -9.271,2.159 h1.2 r270
  text "PWR" at -7.493,1.778 h1.2
  text "GND" at -9.271,-0.127 h1.2 r270
  text "C13" at -7.366,-2.54 h1.2
  text "3V3" at -9.271,-2.921 h1.2 r270
  text "BT0" at -2.54,-4.064 h1.2 r90
  text "C13" at -12.319,-5.715 h1.2
  text "B9" at -9.525,-5.715 h1.2
  text "BT0" at -7.366,-5.715 h1.2
  text "B6" at -4.445,-5.715 h1.2
  text "B4" at -1.905,-5.715 h1.2
  text "A14" at 0.254,-5.715 h1.2
  text "A12" at 2.921,-5.715 h1.2
  text "A10" at 5.461,-5.715 h1.2
  text "A8" at 8.255,-5.715 h1.2
  text "5V" at 10.795,-5.715 h1.2
  text "BAT" at -12.319,-6.604 h1.2
  text "B8" at -9.525,-6.604 h1.2
  text "B7" at -6.985,-6.604 h1.2
  text "B5" at -4.445,-6.604 h1.2
  text "B3" at -1.905,-6.604 h1.2
  text "A15" at 0.254,-6.604 h1.2
  text "A13" at 2.921,-6.604 h1.2
  text "A11" at 5.461,-6.604 h1.2
  text "A9" at 8.255,-6.604 h1.2
  text "G" at 11.049,-6.604 h1.2
Bottom Overlay:
  text "MuLuoxing" at 12.319,-5.969 h1.36

## Dimensions
-11.43,11.43 to -11.43,-11.43 on Mechanical 15
-12.7,-10.16 to 12.7,-10.16 on Mechanical 15